# Altium PCB sinking-clock_Brain-PCB.PcbDoc
Units mil, origin at the board's own origin, x right, y up, seen from the top; angles counter-clockwise.
Board outline 2464.44 x 3503.81 mil, 2 copper layers (Top Layer, Bottom Layer); 61 components, 34 nets, 204 pads, 51 vias.
Unrouted connection lines stored in the file: 3.
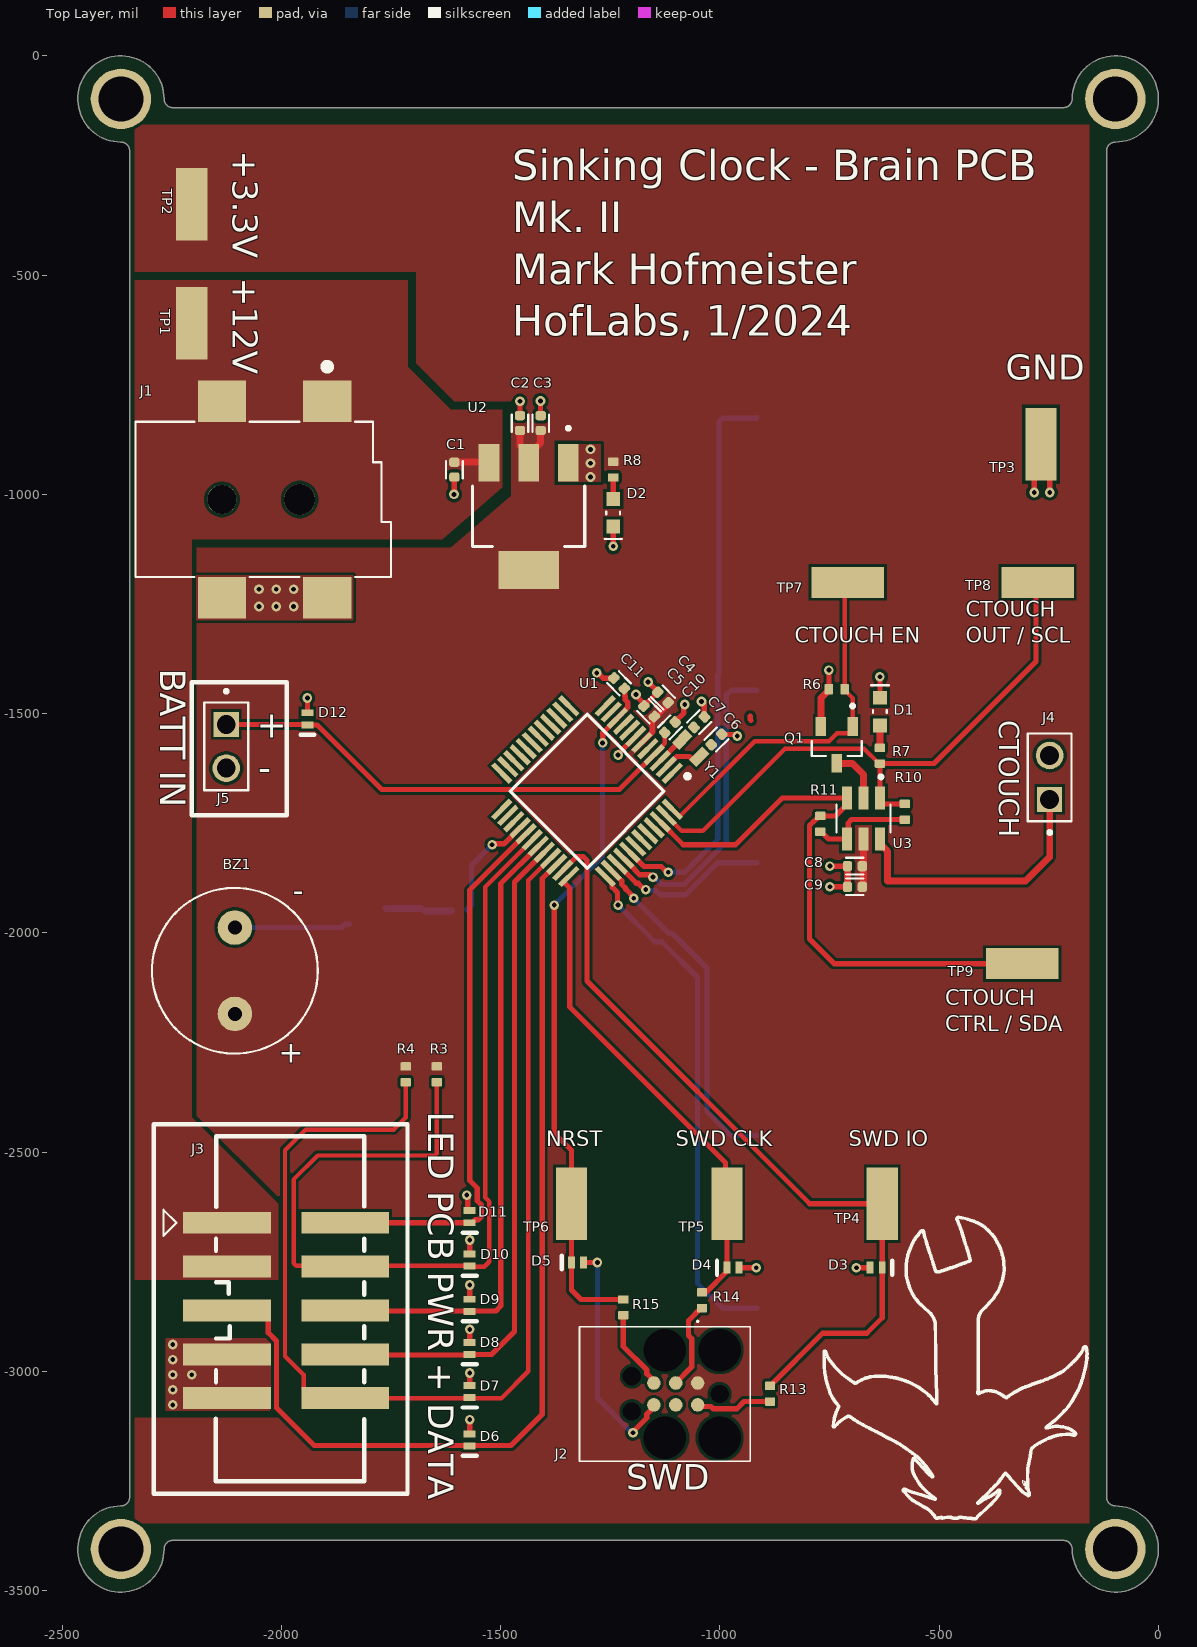
[diagram p0: Top Layer view]
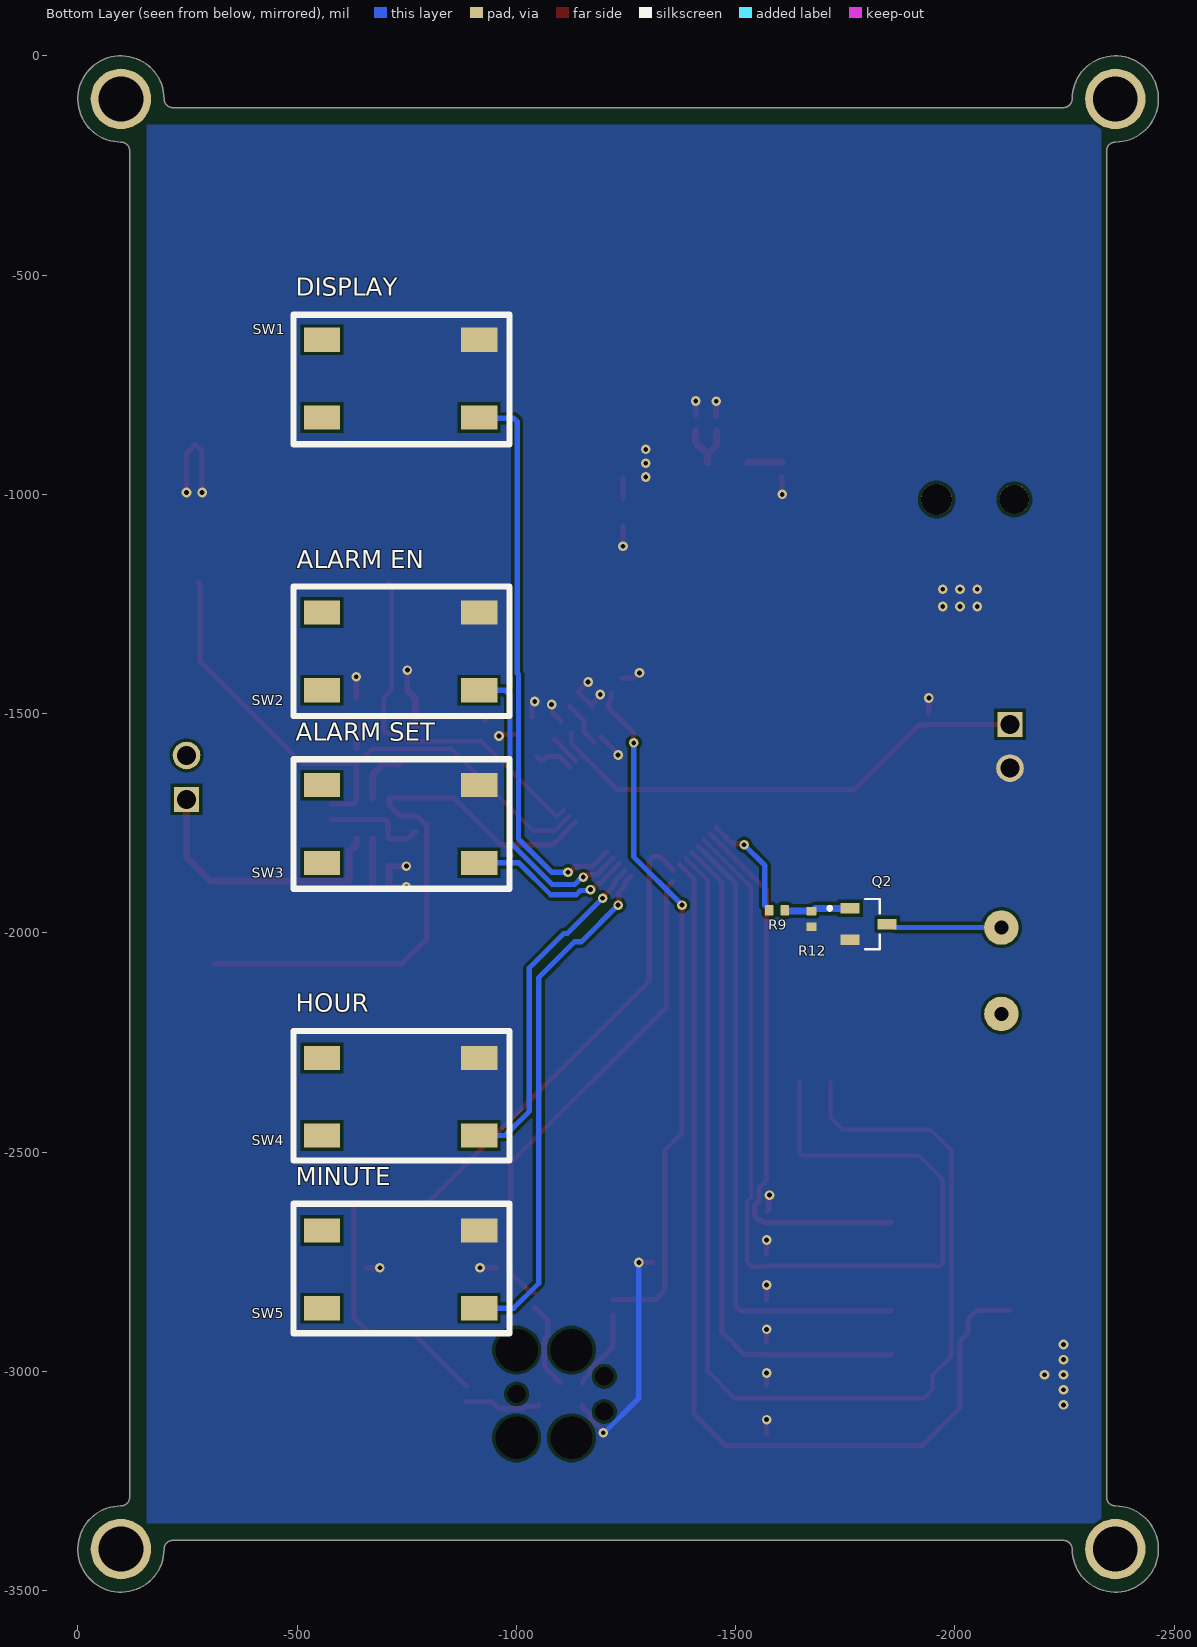
[diagram p1: Bottom Layer view, seen from below]
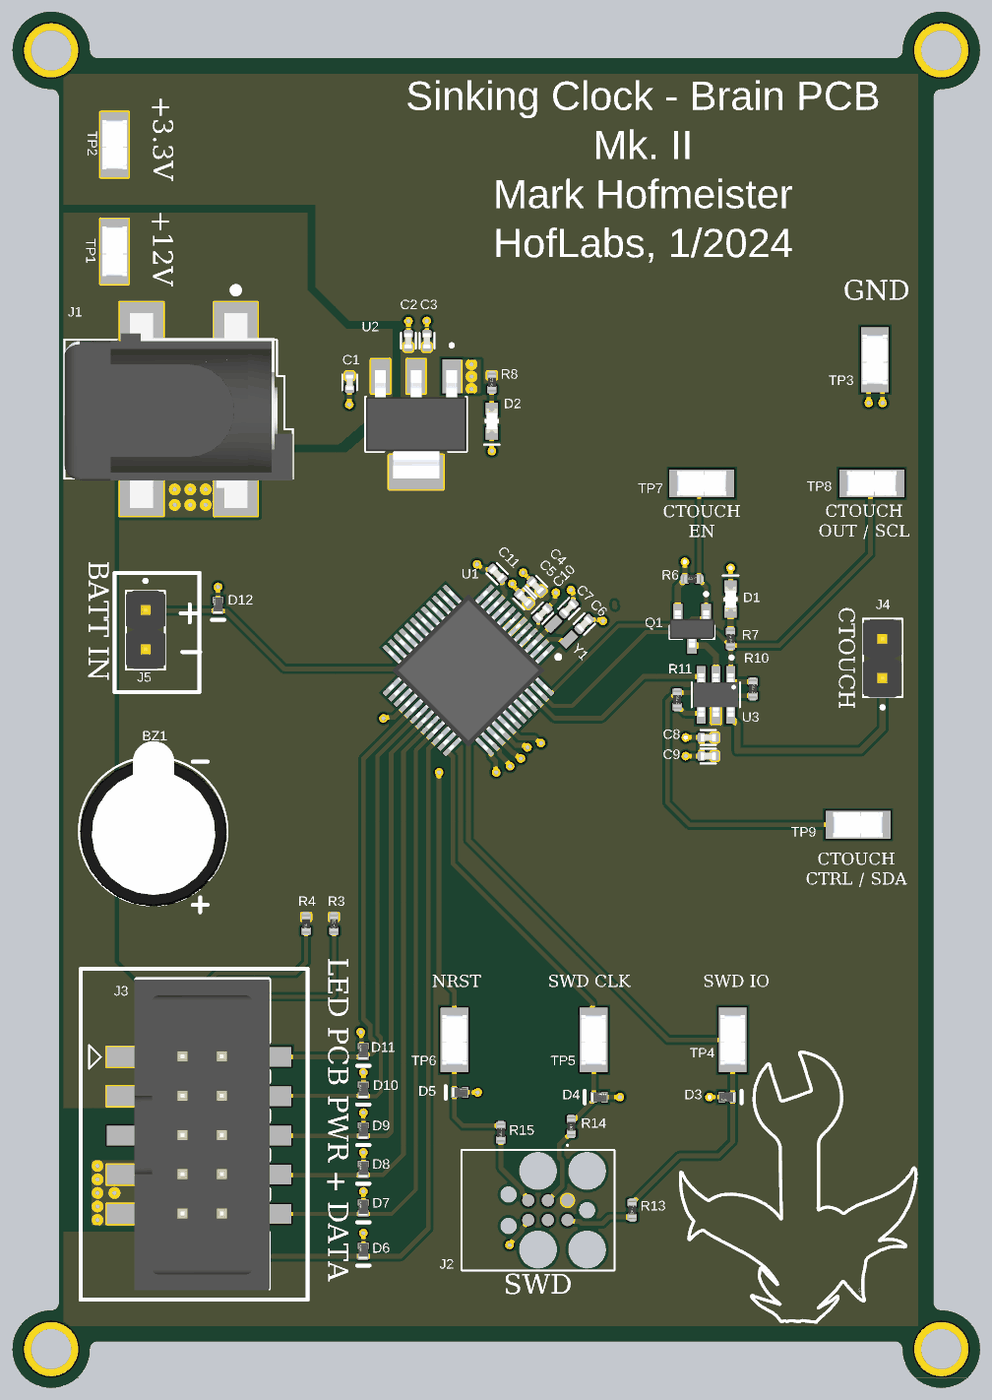
[diagram p2: 3D render of the assembled board from above, using the file's embedded part models]
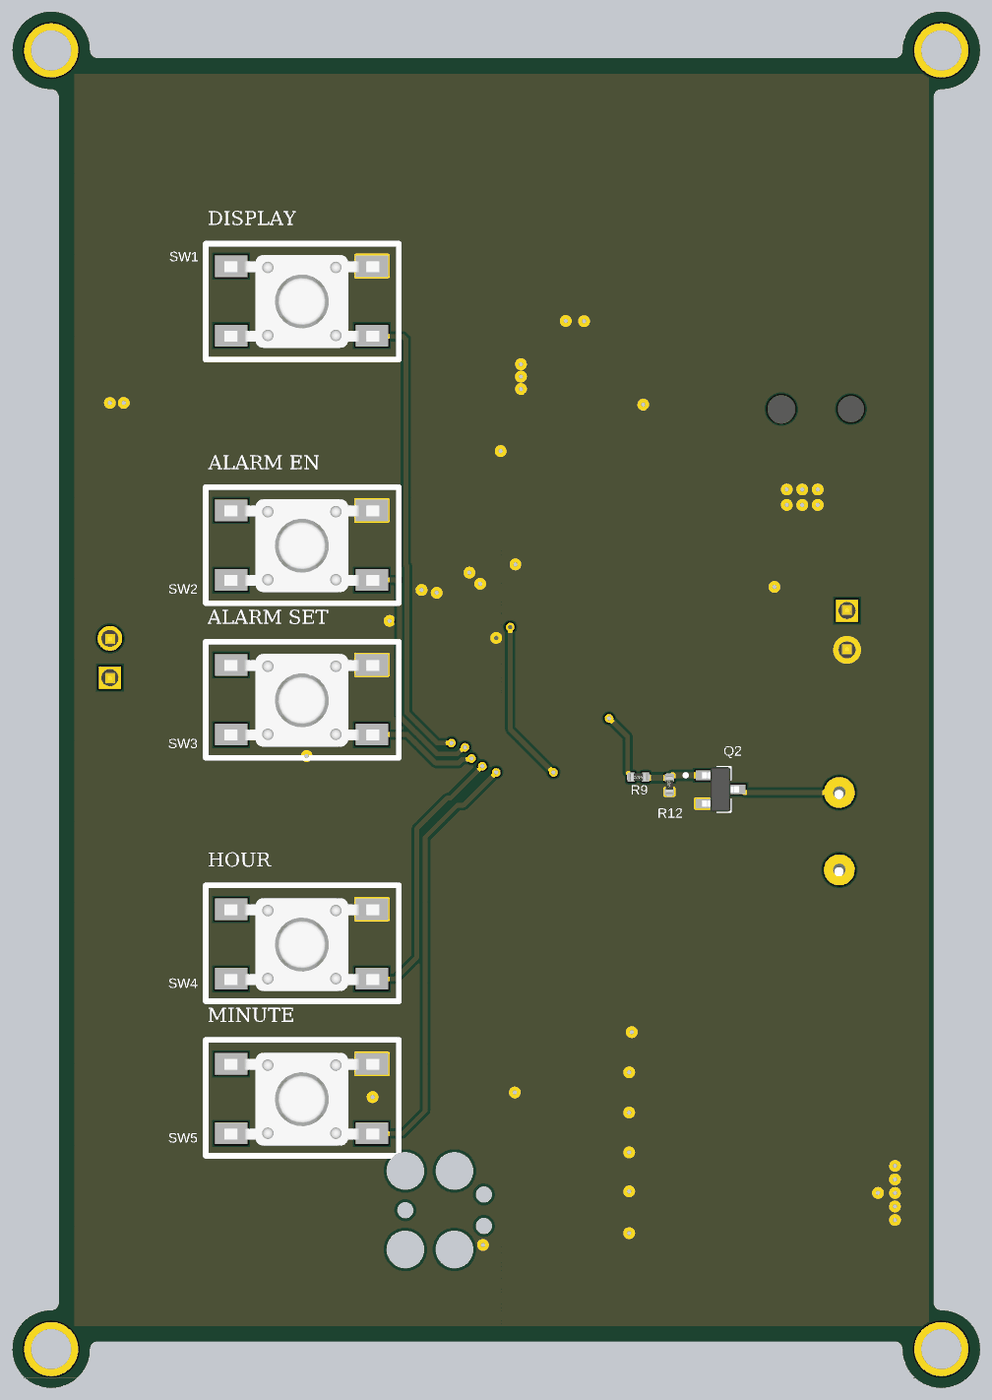
[diagram p3: 3D render of the assembled board from below, using the file's embedded part models]

## Layer stack, top to bottom
Top Solder: solder mask 0.4, Solder Resist, Dk 3.5
Top Layer: signal copper 1.4
Dielectric 1: dielectric 12.6, FR-4, Dk 4.8
Bottom Layer: signal copper 1.4
Bottom Solder: solder mask 0.4, Solder Resist, Dk 3.5

## Board outline
-2366.14,-3307.09 ccw(c-2366.14,-3405.51) -2267.72,-3405.51 cw(c-2248.03,-3405.51) -2248.03,-3385.83 -216.54,-3385.83 cw(c-216.54,-3405.51) -196.85,-3405.51 ccw(c-98.43,-3405.51) -98.43,-3307.09 cw(c-98.43,-3287.4) -118.11,-3287.4 -118.11,-216.54 cw(c-98.43,-216.54) -98.43,-196.85 ccw(c-98.43,-98.43) -196.85,-98.43 cw(c-216.54,-98.43) -216.54,-118.11 -2248.03,-118.11 cw(c-2248.03,-98.43) -2267.72,-98.43 ccw(c-2366.14,-98.43) -2366.14,-196.85 cw(c-2366.14,-216.54) -2346.46,-216.54 -2346.46,-3287.4 cw(c-2366.14,-3287.4)

## Design rules (kind name [scope] priority, off if disabled: settings)
Clearance [All] p1: gap=7 ignorepadtopadclearanceinfootprint=FALSE except(0: Arc-Hole Track-Hole SMDPad-Hole THPad-Hole Via-Hole Fill-Hole Poly-Hole Region-Hole Text-Hole)
HoleSize [All] p1: absolutevalues=TRUE maxlimit=106.3 minlimit=6 maxpercent=80.000 minpercent=20.000
MinimumSolderMaskSliver [All] p1: minsoldermaskwidth=0.98
PolygonConnect PolygonConnect_3 [InNet('GND') vs InNet('GND')] p1: connectstyle=Direct reliefconductorwidth=10 reliefentries=4 polygonreliefangle="90 Angle" airgapwidth=10
PolygonConnect PolygonConnect_2 [InNet('VCC')] p2: connectstyle=Direct reliefconductorwidth=10 reliefentries=4 polygonreliefangle="90 Angle" airgapwidth=10
PolygonConnect PolygonConnect_1 [InNet('+12')] p3: connectstyle=Direct reliefconductorwidth=10 reliefentries=4 polygonreliefangle="90 Angle" airgapwidth=10
PolygonConnect [All] p4: connectstyle=Relief reliefconductorwidth=10 reliefentries=4 polygonreliefangle="90 Angle" airgapwidth=10
RoomDefinition CTOUCH [InComponentClass('CTOUCH')] p1: confinementstyle=ConfineIn formatcopy=TRUE lockcomponents=FALSE outline -812.17,-1253.11 -812.17,-1148.46 -172.09,-1148.46 -172.09,-1253.11 -177.2,-1253.11 -177.2,-1789.13 -207.13,-1789.13 -207.13,-2122.8 -414.13,-2122.8 -414.13,-1927.52 -736.77,-1927.52 -736.77,-1833.62 -750.55,-1833.62 -750.55,-1799.96 -803.9,-1799.96 -803.9,-1655.87 -811.57,-1655.87 -811.57,-1253.11
RoomDefinition PWR [InComponentClass('PWR')] p2: confinementstyle=ConfineIn formatcopy=TRUE lockcomponents=FALSE outline -2353.5,-1304.29 -2353.5,-683.31 -2257.05,-683.31 -2257.05,-506.73 -2257.05,-235.08 -2152.4,-235.08 -2152.4,-506.73 -2152.4,-683.31 -1729.17,-683.31 -1729.17,-793.11 -1376.63,-793.11 -1376.63,-831.5 -1287.65,-831.5 -1287.65,-895.48 -1210.88,-895.48 -1210.88,-974.22 -1206.94,-974.22 -1206.94,-2789.8 -1008.5,-2789.8 -853.19,-2789.8 -853.19,-3002.8 -853.19,-3099.57 -918.46,-3099.57 -918.46,-2902.72 -1253.11,-2902.72 -1253.11,-1981.46 -1642.87,-1981.46 -1642.87,-1304.29
RoutingVias [All] p1: holewidth=11 width=22 viastyle="Through Hole" minholewidth=8 minwidth=16 maxholewidth=28 maxwidth=50
SilkToSolderMaskClearance [IsPad] p1: minsilkscreentomaskgap=3.94 clearancetoexposedcopper=TRUE
SolderMaskExpansion [All] p1: expansion=4 istentingtop=FALSE
UnRoutedNet [All] p1: checkbadconnections=TRUE
Width [All] p1: maxlimit=50 minlimit=6 preferedwidth=12 minimp=50.000000 maximp=50.000000 favimp=50.000000
26 further rules are at their usual default settings.

## Classes and differential pairs
component class PWR: C1 C2 C3 D2 J1 R8 R9 R13 R14 R15 TP1 TP2 U2
component class CTOUCH: C8 C9 D1 J4 Q1 R6 R7 R10 R11 TP7 TP8 TP9 U3

## Components (designator, comment, footprint, x,y, rotation, side; value= is the part's Value field where it differs from the comment)
BZ1 "CMI-9605IC-0380T" CUI_CMI-9605IC-0380T -2106.3,-2086.61 r180 top
C1 "CAP" 0402C -1605.72,-943.86 r90 top value=10uF
C2 "CAP" 0402C -1456.12,-837.56 r270 top value=10uF
C3 "CAP" 0402C -1408.87,-837.56 r270 top value=10uF
C4 "CAP" 0402C -1130.09,-1463.33 r315 top value=4.7uF
C5 "CAP" 0402C -1161.58,-1494.83 r315 top value=0.1uF
C6 "CAP" 0402C -1007.87,-1559.06 r225 top value=7pF
C7 "CAP" 0402C -1047.24,-1519.68 r225 top value=7pF
C8 "CAP" 0402C -692.32,-1848.03 r0 top value=100pF
C9 "CAP" 0402C -692.32,-1895.28 r0 top value=4.7uF
C10 "CAP" 0402C -1114.17,-1531.5 r225 top value=4.7uF
C11 "CAP" 0402C -1230,-1431 r315 top value=0.1uF
D1 "LED - single" "LED - 0603" -635.24,-1495.67 r90 top
D2 "LED - single" "LED - 0603" -1243.52,-1042.29 r270 top
D3 "7V" DESD3V3S1BL-7B -630.91,-2763.78 r180 top
D4 "7V" DESD3V3S1BL-7B -983.27,-2763.78 r0 top
D5 "7V" DESD3V3S1BL-7B -1337.6,-2751.97 r0 top
D6 "7V" DESD3V3S1BL-7B -1570.87,-3169.29 r90 top
D7 "7V" DESD3V3S1BL-7B -1570.87,-3059.06 r90 top
D8 "7V" DESD3V3S1BL-7B -1570.87,-2960.63 r90 top
D9 "7V" DESD3V3S1BL-7B -1570.87,-2862.4 r90 top
D10 "7V" DESD3V3S1BL-7B -1570.87,-2758.86 r90 top
D11 "7V" DESD3V3S1BL-7B -1570.87,-2660.43 r90 top
D12 "7V" DESD3V3S1BL-7B -1940.94,-1524.8 r90 top
J1 "PJ-002BH-SMT-TR" PJ-002BH-SMT-TR -1895.67,-787.4 r0 top
J2 "TC2030-IDC" "TAG CONNECT TC2030IDC - NO 3D MODEL" -1088.31,-3051.81 r180 top
J3 "5x2, 0.1' pitch SMT header" "5x2, 0.1' pitch SMT header" -1989.33,-2861.42 r270 top
J4 "2-pin connector" "2-pos, 0.1\" TH header" -248.03,-1645.67 r90 top value=DNS
J5 "2-pin connector" "2-pos, 0.1\" TH header" -2125.98,-1574.8 r270 top value=DNS
Q1 "NMOS" SOT-23 -733.66,-1571.46 r270 top
Q2 "NMOS" SOT-23 -1803.55,-1980.32 r180 bottom
R3 "RES" 0402R -1645.67,-2322.83 r90 top value=10k
R4 "RES" 0402R -1716.54,-2322.83 r90 top value=10k
R6 "RES" 0402R -733.66,-1444.49 r0 top value=10k
R7 "RES" 0402R -635.24,-1596.26 r270 top value=56
R8 "RES" 0402R -1243.52,-943.86 r90 top value=56
R9 "RES" 0402R -1594.49,-1948.82 r0 bottom value=56
R10 "RES" 0402R -578.35,-1724.02 r270 top value=4.7k
R11 "RES" 0402R -771.26,-1751.57 r270 top value=4.7k
R12 "RES" 0402R -1673.23,-1968.5 r90 bottom value=10k
R13 "RES" 0402R -885.83,-3051.18 r90 top value=56
R14 "RES" 0402R -1041.14,-2838.19 r90 top value=56
R15 "RES" 0402R -1220.47,-2854.33 r90 top value=56
SW1 "SPDT SMT Tactile Push Button Switch" TL3301BF160QGTUBE -736.22,-736.22 r90 bottom locked
SW2 "SPDT SMT Tactile Push Button Switch" TL3301BF160QGTUBE -736.22,-1358.27 r90 bottom locked
SW3 "SPDT SMT Tactile Push Button Switch" TL3301BF160QGTUBE -736.22,-1751.97 r90 bottom locked
SW4 "SPDT SMT Tactile Push Button Switch" TL3301BF160QGTUBE -736.22,-2374.02 r90 bottom locked
SW5 "SPDT SMT Tactile Push Button Switch" TL3301BF160QGTUBE -736.22,-2767.72 r90 bottom locked
TP1 "RCWCTE" RCWCTE -2204.72,-610.24 r270 top
TP2 "RCWCTE" RCWCTE -2204.72,-338.58 r270 top
TP3 "RCWCTE" RCWCTE -267.72,-885.83 r270 top
TP4 "RCWCTE" RCWCTE -629.92,-2618.11 r270 top
TP5 "RCWCTE" RCWCTE -984.25,-2618.11 r270 top
TP6 "RCWCTE" RCWCTE -1338.58,-2618.11 r270 top
TP7 "RCWCTE" RCWCTE -708.66,-1200.79 r0 top
TP8 "RCWCTE" RCWCTE -275.59,-1200.79 r0 top
TP9 "RCWCTE" RCWCTE -310.63,-2070.47 r0 top
U1 "STM32G031C6T6" 48-LQFP -1303.15,-1677.17 r225 top locked
U2 "AZ1117IH-3.3TRG1" SOT-223-3 -1436.43,-1050.16 r270 top
U3 "IQS228B00000000TSR" TSOT-23-6 -672.64,-1739.57 r270 top
Y1 "ECS-.327-7-12R-TR" ECS-.327-12.5-12R-TR -1066.93,-1578.74 r315 top

## Footprints (in the part's own frame and the unit in brackets; to place one, negate y for a bottom-side part, rotate by r counter-clockwise, add the part's x,y. Pads: shape width x height; smd on the part's side, far side on the other; paste and mask are expansions set on the pad)
"2-pos, 0.1\" TH header" [mm]
  rect 1.45x1.45 / inner round 1.45 / far side rect 1.45x1.45 hole 1.1: 1(-1.27,0)
  round 1.6 hole 1.1: 2(1.27,0)
  silkscreen extent -3.29,-1.27 2.54,1.27, body extent -2.57,-1.26 2.51,1.28, height 8.57
"5x2, 0.1' pitch SMT header" [mil] "CONN HEADER SMD 10POS 2.54MM"
  rect 50x200 smd: 1(-200,-135) 2(-200,135) 3(-100,-135) 4(-100,135) 5(0,-135) 6(0,135) 7(100,-135) 8(100,135) 9(200,-135) 10(200,135)
  silkscreen extent -398,-280 390,178, body extent -396,-165 394,180, height 496
48-LQFP [mm]
  rect 1.475x0.3 smd mask+0.03: 1(-4.238,2.75) 2(-4.238,2.25) 3(-4.238,1.75) 4(-4.238,1.25) 5(-4.238,0.75) 6(-4.238,0.25) 7(-4.238,-0.25) 8(-4.238,-0.75) 9(-4.238,-1.25) 10(-4.238,-1.75) 11(-4.238,-2.25) 12(-4.238,-2.75) 25(4.238,-2.75) 26(4.238,-2.25) 27(4.238,-1.75) 28(4.238,-1.25) 29(4.238,-0.75) 30(4.238,-0.25) 31(4.238,0.25) 32(4.238,0.75) 33(4.238,1.25) 34(4.238,1.75) 35(4.238,2.25) 36(4.238,2.75)
  rect 0.3x1.475 smd mask+0.03: 13(-2.75,-4.238) 14(-2.25,-4.238) 15(-1.75,-4.238) 16(-1.25,-4.238) 17(-0.75,-4.238) 18(-0.25,-4.238) 19(0.25,-4.238) 20(0.75,-4.238) 21(1.25,-4.238) 22(1.75,-4.238) 23(2.25,-4.238) 24(2.75,-4.238) 37(2.75,4.238) 38(2.25,4.238) 39(1.75,4.238) 40(1.25,4.238) 41(0.75,4.238) 42(0.25,4.238) 43(-0.25,4.238) 44(-0.75,4.238) 45(-1.25,4.238) 46(-1.75,4.238) 47(-2.25,4.238) 48(-2.75,4.238)
  silkscreen extent -4.85,-3.15 3.15,3.62, body extent -4.5,-4.5 4.5,4.5, height 1.6
0402C [mm] "0402 SMT Capacitor"
  rrect53% 0.54x0.6 smd: 1(-0.43,0) 2(0.43,0)
  silkscreen extent -0.5,-0.48 0.5,0.48, body extent -0.5,-0.25 0.5,0.25, height 0.5
0402R [mm] "0402 SMT Resistor"
  rrect20% 0.49x0.6 smd: 1(-0.455,0) 2(0.455,0)
  body extent -0.75,-0.25 0.75,0.25, height 0.35
CUI_CMI-9605IC-0380T [mm]
  round 2 hole 0.8: N(0,-2.5) P(0,2.5)
  silkscreen extent -4.8,-4.8 4.8,4.8, body extent -4.78,-5.82 4.72,4.88, height 5.05
DESD3V3S1BL-7B [mm]
  rect 0.4x0.7 smd mask+0.076: 1(-0.025,0) 2(0.675,0)
  silkscreen extent -0.6,-0.4 -0.6,0.4, body extent -0.18,-0.3 0.82,0.3, height 0.53
ECS-.327-12.5-12R-TR [mm]
  rect 0.6x1.1 smd: 1(-0.7,0) 2(0.7,0)
  body extent -1,-0.55 1,0.55, height 0.6
"LED - 0603" [mm]
  rect 0.8x0.8 smd: 1(-0.8,0) 2(0.8,0)
  silkscreen extent -0.08,-0.51 1.52,0.51, body extent -0.8,-0.35 0.8,0.35, height 0.7
PJ-002BH-SMT-TR [mm] "Barrel Jack 2.5mm ID 5.5mm OD"
  rect 2.8x2.4 smd: 1(-6.1,0) 1(0,0) 2(-6.1,-11.4) 3(0,-11.4)
  round 1.7 hole 1.7 unplated: ""(-6.1,-5.7)
  round 1.8 hole 1.8 unplated: ""(-1.6,-5.7)
  silkscreen extent -11.1,-10.2 3.7,2.19, body extent -11.1,-12.1 3.7,0.5, height 11
RCWCTE [mm]
  rect 4.2x1.8 smd: 1(0,0)
  body extent -1.6,-0.8 1.6,0.8, height 2.01
SOT-23 [mm]
  rect 1.09x0.61 smd: 1(-1.07,0.915) 2(-1.07,-0.915) 3(1.07,0)
  silkscreen extent -2.35,-1.45 0.65,1.45, body extent -1.2,-1.45 1.2,1.45, height 1.2
SOT-223-3 [mm]
  rect 2.2x1.2 smd: 1(-3.1,2.3) 2(-3.1,0) 3(-3.1,-2.3)
  rect 2.2x3.5 smd: 4(3.1,0)
  silkscreen extent -5.2,-3.25 1.75,3.25, body extent -3.5,-3.25 3.5,3.25, height 1.65
"TAG CONNECT TC2030IDC - NO 3D MODEL" [mil]
  round 30.83 smd: 1(-37.52,-25) 2(-37.52,25) 3(12.48,-25) 4(12.48,25) 5(62.52,-25) 6(62.52,25)
  round 48.25 hole 96.5 unplated: 7(-87.52,-100) 9(-87.52,100) 10(37.48,-100) 11(37.48,100)
  round 21 hole 42.01 unplated: 8(-87.52,0) 12(112.48,-40) 13(112.48,40)
  silkscreen extent -157,-167 232,154
TL3301BF160QGTUBE [mm]
  rect 1.4x2.1 smd: 1(-2.25,-4.55) 2(-2.25,4.55) 3(2.25,-4.55) 4(2.25,4.55)
  body extent -3.04,-5.02 2.96,4.98, height 9.55
TSOT-23-6 [mm]
  rect 1.34x0.59 smd: 1(-1.19,0.95) 2(-1.19,0) 3(-1.19,-0.95) 4(1.19,-0.95) 5(1.19,0) 6(1.19,0.95)
  silkscreen extent -2.52,-1.56 0.8,1.56, body extent -1.4,-1.45 1.4,1.45, height 1

## Part data
BZ1: "MAGNETIC BUZZER INDICATOR", MFR="CUI Devices", MFR PN=CMI-9605IC-0380T, Vendor=DigiKey, Vendor Link=https://www.digikey.com/en/products/detail/cui-devices/CMI-9605IC-0380T/11674180, Vendor PN=2223-CMI-9605IC-0380T-ND
C1 C2 C3: "Capaicitor", MFR="KYOCERA AVX", MFR PN=KGM05CR51A106MH, ClassName=PWR, Vendor=DigiKey, Vendor Link=https://www.digikey.com/en/products/detail/kyocera-avx/KGM05CR51A106MH/6564275, Vendor PN=478-KGM05CR51A106MHCT-ND
C4 C9 C10: "Capaicitor", MFR="Samsung Electro-Mechanics", MFR PN=CL05A475KQ5NRNC, Vendor=DigiKey, Vendor Link=https://www.digikey.com/en/products/detail/samsung-electro-mechanics/CL05A105KL5NRNC/5961280, Vendor PN=1276-6796-1-ND
  C9: ClassName=CTOUCH
C5 C11: "Capaicitor", MFR="Samsung Electro-Mechanics", MFR PN=CL05A104KP5NNNC, Vendor=DigiKey, Vendor Link=https://www.digikey.com/en/products/detail/samsung-electro-mechanics/CL05A104KP5NNNC/3886680, Vendor PN=1276-1022-1-ND
C6 C7: "Capaicitor", MFR="Murata Electronics", MFR PN=GJM1555C1H7R0DB01D, Vendor=DigiKey, Vendor Link=https://www.digikey.com/en/products/detail/murata-electronics/GJM1555C1H7R0DB01D/2593109, Vendor PN=490-13315-1-ND
C8: "Capaicitor", MFR="Walsin Technology Corporation", MFR PN=HH15N101J500CT, ClassName=CTOUCH, Vendor=DigiKey, Vendor Link=https://www.digikey.com/en/products/detail/walsin-technology-corporation/HH15N101J500CT/14836854, Vendor PN=1292-HH15N101J500CT-ND
D1 D2: "LED", Color=Green, MFR=Dialight, MFR PN=5988070107F, Vendor=DigiKey, Vendor Link=https://www.digikey.com/en/products/detail/dialight/5988070107F/1291269, Vendor PN=350-2035-1-ND
  D1: ClassName=CTOUCH
  D2: ClassName=PWR
D3 D4 D5 D6 D7 D8 D9 D10 D11 D12: library part "TVS Diode Bi", MFR="Diodes Incorporated", MFR PN=DESD3V3E1BL-7B
J1: "2.5 mm Center Pin, 5.0 A, Right Angle, Surface Mount (SMT), Dc Power Jack Connector", MFR="CUI Devices", ClassName=PWR, MFR PN=PJ-002BH-SMT-TR, Vendor=DigiKey, Vendor Link=https://www.digikey.com/en/products/detail/cui-devices/PJ-002BH-SMT-TR/404626, Vendor PN=CP-002BHPJCT-ND
J2: "\"Plug of Nails\" POGO Pin connector", MFR=Tag-Connect, MFR PN=TC2030-IDC-NL
J3: "CONN HEADER SMD 10POS 2.54MM", MFR="CNC Tech", MFR PN=3020-10-0300-00, Vendor=DigiKey, Vendor Link=https://www.digikey.com/en/products/detail/cnc-tech/3020-10-0300-00/3441727, Vendor PN=1175-1621-ND
J4 J5: "2-pos connector, 0.1\", TH, male"
  J4: ClassName=CTOUCH
Q1 Q2: "N-Channel MOSFET", MFR="Diodes Incorporated", MFR PN=DMN63D8L
  Q1: ClassName=CTOUCH, Vendor=DigiKey, Vendor Link=https://www.digikey.com/en/products/detail/diodes-incorporated/DMN63D8L-7/5699705, Vendor PN=DMN63D8L-7DICT-ND
R3 R4 R6 R12: "Resistor", MFR=YAGEO, MFR PN=RC0402JR-0710KL, Vendor=DigiKey, Vendor Link=https://www.digikey.com/en/products/detail/yageo/RC0402JR-0710KL/726418, Vendor PN=311-10KJRCT-ND
  R6: ClassName=CTOUCH
R7 R8 R9 R13 R14 R15: "Resistor", MFR=YAGEO, MFR PN=RC0402FR-0756RL, Vendor=DigiKey, Vendor Link=https://www.digikey.com/en/products/detail/yageo/RC0402FR-0756RL/726636, Vendor PN=311-56.0LRCT-ND
  R7: ClassName=CTOUCH
  R8 R9 R13 R14 R15: ClassName=PWR
R10 R11: "Resistor", MFR=YAGEO, MFR PN=AC0402FR-134K7L, ClassName=CTOUCH, Vendor=DigiKey, Vendor Link=https://www.digikey.com/en/products/detail/yageo/AC0402FR-134K7L/14008367, Vendor PN=13-AC0402FR-134K7LCT-ND
SW1 SW2 SW3 SW4 SW5: "Tactile Push Button Switch, Gull Wing Lead, 9.5mm contact height", MFR=E-Switch, MFR PN=TL3301BF160QG, Vendor=DigiKey, Vendor Link=https://www.digikey.com/en/products/detail/e-switch/TL3301BF160QGTUBE/1805543, Vendor PN=141-TL3301BF160QGTUBE-ND
TP1 TP2 TP3 TP4 TP5 TP6 TP7 TP8 TP9: library part "Test Point", "Test Point, Surface Mount", MFR="KOA Speer Electronics, Inc.", MFR PN=RCWCTE, Vendor=DigiKey, Vendor Link=https://www.digikey.com/en/products/detail/koa-speer-electronics-inc/RCWCTE/11476558, Vendor PN=2019-RCWCTECT-ND
  TP1 TP2: ClassName=PWR
  TP7 TP8 TP9: ClassName=CTOUCH
U1: "STM32G031C6T6 - ARM MCU, STM32 Family STM32G0 Series Microcontrollers, ARM Cortex-M0+, 32bit, 64 MHz, 32 KB, 8 KB", MFR=STMicroelectronics, MFR PN=STM32G031C6T6, Vendor=DigiKey, Vendor Link=https://www.digikey.com/en/products/detail/stmicroelectronics/STM32G031C6T6/10300268, Vendor PN=497-19555-ND
U2: "IC REG LINEAR 3.3V 1A SOT223", MFR="Diodes Incorporated", ClassName=PWR, MFR PN=AZ1117IH-3.3TRG1, Vendor=DigiKey, Vendor Link=https://www.digikey.com/en/products/detail/diodes-incorporated/AZ1117IH-3-3TRG1/5699672, Vendor PN=AZ1117IH-3.3TRG1DICT-ND
U3: "Azoteq 1 CH Capacitive Sensor", MFR=Azoteq, ClassName=CTOUCH, MFR PN=IQS228B00000000TSR, Vendor=DigiKey, Vendor Link=https://www.digikey.com/en/products/detail/azoteq-pty-ltd/IQS228B-00000000-TSR/13663636, Vendor PN=1790-IQS228B-00000000-TSRCT-ND
Y1: "SMD Tuning Fork Crystal", MFR="ECS Inc.", MFR PN=ECS-.327-7-12R-TR, Vendor=DigiKey, Vendor Link=https://www.digikey.com/en/products/detail/ecs-inc/ECS-327-7-12R-TR/8593599, Vendor PN=XC2743CT-ND

## Free pads (board coordinates)
  round 137.8 hole 102.36: 4(-2366.14,-3405.51) 4(-2366.14,-98.43) 4(-98.43,-3405.51) 4(-98.43,-98.43)

## Via types
v1: diameter 22, hole 11, Top Layer to Bottom Layer, 51 vias

## Nets (pads, with @x,y where several pads share a name; then routed paths per layer and width w, separated by ;. In a path a pad name is that pad's centre, name@x,y a point inside that pad or via, vN(x,y) a via of type N, cw(c..) or ccw(c..) an arc to the next point about the centre after c; other vN are vias at no path point)
+12: C1.2 J1.1 J3.1 J3.3 TP1.1 U2.3 | length 79.2
  Top Layer w16: C1.2 -1528.16,-926.93 U2.3
ALARM_EN_BUTTON: SW2.1 U1.40 | length 710
  Top Layer w12: U1.40 -1195.19,-1854.72 -1195.19,-1855.69 -1182.92,-1867.96 -1159.6,-1867.96 -1154.36,-1873.19 v1(-1152.72,-1873.19)
  Bottom Layer w12: v1(-1152.72,-1873.19) -1150.02,-1873.19 -1133.45,-1889.76 -1081.99,-1889.76 -985.94,-1793.71 -985.94,-1458.09 -974.69,-1446.85 SW2.1
Alarm_LED: D6.1 J3.5 U1.34 | length 2251.6
  Top Layer w12: J3.5 -2049.33,-2861.42 -2030.33,-2880.42 -2030.33,-2912.03 -2011.33,-2931.03 -2011.33,-3083.16 -1925.2,-3169.29 -1570.87,-3169.29 -1476.38,-3169.29 -1405.51,-3098.43 -1405.51,-1876.96 U1.34
ALARM_SET_BUTTON: SW3.1 U1.39 | length 377.5
  Top Layer w12: U1.39 -1190.79,-1886.96 -1186.61,-1886.96 -1172,-1901.57 v1(-1169.29,-1901.57)
  Bottom Layer w12: v1(-1169.29,-1901.57) -1167.38,-1903.49 -1146.59,-1903.49 -1136.7,-1913.39 -1078.74,-1913.39 -1005.91,-1840.55 SW3.1
BUZZER_OUT: R9.2 U1.28 | length 253
  Top Layer w12: v1(-1519.68,-1799.21) -1517.77,-1797.3 -1492.88,-1797.3 U1.28
  Bottom Layer w12: R9.2 -1576.57,-1946.65 -1566.93,-1937.01 -1566.93,-1846.46 v1(-1519.68,-1799.21)
CAPTOUCH_EN: Q1.1 R6.2 TP7.1 U1.48 | length 847.3
  Top Layer w10: U1.48 -1092.39,-1734.81 -1092.26,-1734.81 -920.44,-1562.99 -751.5,-1562.99 -733.29,-1544.79 -703.65,-1544.79 -697.64,-1538.78 Q1.1 -697.64,-1464.76 -715.75,-1446.65 R6.2 -715.75,-1207.87 TP7.1
CAPTOUCH_IN: J4.1 U3.6 | length 626.3
  Top Layer w15.75: -618.11,-1881.89 -303.15,-1881.89 -248.03,-1826.77 J4.1@-248.03,-1698.37
  Top Layer w16: U3.6 -635.24,-1801.18 -631.62,-1804.8 -627.48,-1804.8 -618.11,-1814.17 -618.11,-1881.89
CAPTOUCH_OUT_SCL: R7.2 R10.1 TP8.1 U1.47 U3.1 | length 1373.9
  Top Layer w10: U1.47 -1087.32,-1767.72 -1039.37,-1767.72 -851.78,-1580.13 -671.45,-1580.13 -637.4,-1614.17 R7.2
  Top Layer w12: R10.1 -629.62,-1706.1 -635.24,-1700.49 U3.1 R7.2 -511.81,-1614.17 -279.13,-1381.5 -279.13,-1204.33 TP8.1
CTOUCH_CTRL_SDA: R11.1 TP9.1 U1.46 U3.3 | length 1380.5
  Top Layer w12: U1.46 -1083.67,-1799.21 -964.57,-1799.21 -858.07,-1692.72 U3.3 -710.04,-1707.48 -736.22,-1733.66 R11.1 -773.43,-1735.83 -775.59,-1735.83 -786.61,-1746.84 -787.33,-1746.84 -796.07,-1755.59 -796.07,-2014.17 -739.76,-2070.47 TP9.1
DISPLAY_BUTTON: SW1.1 U1.41 | length 1295.5
  Top Layer w12: U1.41 -1173.11,-1848.96 -1134.06,-1848.96 -1120.82,-1862.2 v1(-1118.11,-1862.2)
  Bottom Layer w12: v1(-1118.11,-1862.2) -1081.3,-1862.2 -1004.94,-1785.84 -1004.94,-1410.88 -1002,-1407.94 -1002,-833.8 -994.97,-826.77 -917.32,-826.77 SW1.1
GND: C1.1 C2.1 C3.1 C4.1 C5.1 C6.1 C7.1 C8.1 C9.1 C10.1 C11.1 D1.2 D2.2 D3.2 D4.2 D5.2 D6.2 D7.2 D8.2 D9.2 D10.2 D11.2 D12.2 J1.2 J1.3 J2.6 J3.7 J3.9 J5.2 Q1.2 Q2.2 R6.1 R12.1 SW1.3 SW2.3 SW3.3 SW4.3 SW5.3 TP3.1 U1.7 U2.1 | length 1881.5
  Top Layer w12: D12.2 v1(-1940.94,-1464.57) ; v1(-1606.65,-1000.35) -1606.18,-999.88 -1606.18,-961.25 C1.1 ; v1(-1577.43,-2598.43) -1575.52,-2600.34 -1575.52,-2631.98 -1572.74,-2631.98 D11.2 ; D6.2 v1(-1570.87,-3110.24) ; D7.2 v1(-1570.87,-3003.94) ; D8.2 v1(-1570.87,-2904.58) ; D9.2 v1(-1570.87,-2803.15) ; D10.2 v1(-1570.87,-2700.79) ; v1(-1456.12,-787.98) C2.1 C2.1@-1454.94,-820.63 ; v1@-1411.36,-789.31 v1(-1409.45,-787.4) -1409.16,-787.69 -1409.16,-820.35 C3.1 ; D5.2 v1(-1279.53,-2751.97) ; v1(-1281.18,-1407.38) -1278.48,-1407.38 -1265.99,-1419.86 -1242.81,-1419.86 C11.1 ; v1(-1243.52,-1118.69) D2.2 ; v1(-1232.28,-1594.49) -1232.28,-1592.38 U1.7 ; v1(-1198.53,-3140.19) -1198.53,-3137.93 -1166.78,-3106.19 -1166.78,-3097.86 -1150.83,-3081.91 J2.6 ; v1(-1191.51,-1456.69) -1191.51,-1459.39 -1172.72,-1478.18 -1172.72,-1482.02 C5.1 ; C5.1@-1169.44,-1478.75 C4.1 -1142.06,-1450.01 v1(-1163.82,-1428.24) ; C10.1 -1102.2,-1518.56 -1082.44,-1498.8 -1082.44,-1481.46 v1(-1080.53,-1479.55) ; v1(-1042.07,-1472.44) -1036.11,-1478.4 -1036.11,-1506.88 C7.1 ; C6.1 -995.07,-1547.92 -967.83,-1547.92 -964.57,-1551.18 v1(-960.63,-1551.18) ; D4.2 v1(-917.32,-2763.78) ; -931.05,-1505.64 -931.05,-1513.83 -929.13,-1515.75 ; R6.1 v1(-751.57,-1401.07) ; v1(-749.43,-1895.28) C9.1 ; v1(-749.43,-1848.03) C8.1 ; v1(-688.98,-2763.78) D3.2 ; D1.2 v1(-635.24,-1416.26) ; v1(-283.46,-996.06) -283.46,-901.57 TP3.1 -248.03,-905.51 v1(-248.03,-996.06)
  Top Layer w16: Q1.2 -769.68,-1464.76 -751.57,-1446.65 R6.1 ; C9.1 C8.1
  Bottom Layer w12: v1(-1279.53,-2751.97) -1279.53,-3061.16 -1200.49,-3140.19 v1(-1198.53,-3140.19)
  other v1: -2248.03,-3076.77 -2248.03,-3042.32 -2248.03,-3007.87 -2204.72,-3007.87 -2248.03,-2973.43 -2248.03,-2938.98 -2051.18,-1255.91 -2011.81,-1255.91 -1972.44,-1255.91 -2051.18,-1216.54 -2011.81,-1216.54 -1972.44,-1216.54 -1295.28,-960.63 -1295.28,-929.13 -1295.28,-897.64
HOUR_SET_BUTTON: SW4.1 U1.38 | length 781.9
  Top Layer w12: U1.38 -1224.02,-1881.57 -1224.02,-1889.87 -1214.72,-1899.17 -1214.72,-1900.68 -1196.85,-1918.55 v1(-1196.85,-1921.26)
  Bottom Layer w12: v1(-1196.85,-1921.26) -1116.21,-2001.9 -1108.33,-2001.9 -1029.6,-2080.63 -1029.6,-2407.69 -974.69,-2462.6 SW4.1
MINUTE_SET_BUTTON: SW5.1 U1.37 | length 1183.4
  Top Layer w12: U1.37 -1245.5,-1887.92 -1245.5,-1896.23 -1233.72,-1908.01 -1233.72,-1935.57 v1(-1232.28,-1937.01)
  Bottom Layer w12: v1(-1232.28,-1937.01) -1148.65,-2020.64 -1132.9,-2020.64 -1051.18,-2102.36 -1051.18,-2799.21 -994.09,-2856.3 SW5.1
NetBZ1_N: BZ1.N Q2.3 | length 263.9
  Bottom Layer w12: BZ1.N -1863,-1988.19 -1855.13,-1980.32 Q2.3
NetC6_2: C6.2 U1.2 Y1.2 | length 90.8
  Top Layer w12: U1.2 -1122.4,-1621.82 -1098.61,-1598.03 -1069.77,-1598.03 -1062.62,-1605.19 -1054.4,-1605.19 Y1.2
NetC7_2: C7.2 U1.3 Y1.1 | length 70.2
  Top Layer w12: U1.3 -1136.32,-1607.9 -1087.67,-1559.25 Y1.1
NetC10_2: C10.2 D12.1 J5.1 U1.4 | length 1131.1
  Top Layer w10: U1.4 -1150.37,-1592.7 -1125.65,-1567.99 -1125.65,-1560.48 -1125.55,-1560.38 -1125.55,-1544.06 C10.2
  Top Layer w12: J5.1 -1940.94,-1524.8 -1939.33,-1526.42 -1918.46,-1526.42 -1771.43,-1673.45 -1229.84,-1673.45 U1.4
NetD1_1: D1.1 R7.1 | length 51.2
  Top Layer w16: R7.1 D1.1
NetD2_1: D2.1 R8.1 | length 49
  Top Layer w12: D2.1 R8.1
NetJ2_2: J2.2 R13.1 | length 175.6
  Top Layer w12: J2.2 -1047.19,-3080.41 -1020.27,-3080.41 -1014.87,-3085.81 -961.62,-3085.81 -944.89,-3069.09 R13.1
NetJ2_3: J2.3 R14.1 | length 202.9
  Top Layer w12: J2.3 -1064.54,-2990.56 -1064.54,-2925.96 -1072,-2918.5 -1072,-2884.8 -1043.31,-2856.1 R14.1
NetJ2_5: J2.5 R15.1 | length 183.4
  Top Layer w12: R15.1 -1220.47,-2943.74 -1166.78,-2997.43 -1166.78,-3005.76 -1150.83,-3021.72 J2.5
NetQ1_3: Q1.3 U3.2 | length 129.9
  Top Layer w16: Q1.3 -733.66,-1613.71 -729.65,-1617.72 -729.65,-1614.35 -697.65,-1614.35 -672.64,-1639.37 U3.2
NetQ2_1: Q2.1 R9.1 R12.2 | length 141.4
  Bottom Layer w16: Q2.1 R12.2@-1681.69,-1944.29 ; R12.2 -1614.05,-1950.59 -1612.4,-1948.94 R9.1
NRST: C11.2 D5.1 R15.2 TP6.1 U1.10 | length 1578.7
  Top Layer w12: v1(-1377.95,-1937.01) -1377.95,-2456.69 -1338.58,-2496.06 TP6.1 D5.1 -1338.58,-2814.96 -1317.13,-2836.42 R15.2 ; v1(-1267.72,-1566.93) -1267.15,-1566.36 -1267.15,-1543.73 U1.10 -1233.89,-1510.33 -1215.08,-1491.53 -1215.08,-1490.56 -1210.1,-1485.58 -1210.1,-1474.81 -1215.94,-1468.97 -1215.94,-1461.57 -1217.21,-1460.3 -1216.38,-1459.46 C11.2@-1216.38,-1452.41
  Bottom Layer w12: v1(-1377.95,-1937.01) -1267.72,-1826.77 v1(-1267.72,-1566.93)
SHIFT_DATA_CLK: D8.1 J3.8 U1.32 | length 1529.8
  Top Layer w12: J3.8 -1852.73,-2963.02 D8.1@-1566.93,-2963.02 ; D8.1@-1566.93,-2961.61 -1520.67,-2961.61 -1468.5,-2909.45 -1468.5,-1884.28 U1.32
SHIFT_DATA_IN: D11.1 J3.2 U1.29 | length 1249.5
  Top Layer w12: J3.2 -1712.6,-2661.42 ; -1708.66,-2661.42 -1564.96,-2661.42 -1558.28,-2654.73 -1551.7,-2654.73 -1544.09,-2647.12 -1544.09,-2620.6 -1553.43,-2611.25 -1553.43,-2581.92 -1570.87,-2564.48 -1570.87,-1903.12 U1.29
SHIFT_MCLR: D7.1 J3.10 R4.1 U1.33 | length 2687.3
  Top Layer w10: R4.1 -1716.54,-2421.26 -1744.09,-2448.82 -1944.88,-2448.82 -1992.13,-2496.06 -1992.13,-2965.59 -1949.33,-3008.39 -1949.33,-3041.42 -1929.33,-3061.42 J3.10 -1498.43,-3061.42 -1437.01,-3000 -1437.01,-1880.62 U1.33
SHIFT_OUTPUT_EN: D10.1 J3.4 R3.1 U1.30 | length 2170.2
  Top Layer w10: R3.1 -1645.67,-2503.54 -1650,-2507.87 -1917.32,-2507.87 -1972.44,-2562.99 -1972.44,-2753.98 -1966.58,-2759.84 -1855.91,-2759.84 J3.4 -1852.76,-2759.84 D10.1 ; D10.1@-1570.87,-2761.42 -1537.35,-2761.42 -1526.09,-2750.15 -1526.09,-2613.14 -1535.43,-2603.8 -1535.43,-1895.53 U1.30
SHIFT_STORE_CLK: D9.1 J3.6 U1.31 | length 1444
  Top Layer w12: J3.6 -1853.35,-2862.4 -1570.87,-2862.4 -1511.16,-2862.4 -1500,-2851.24 -1500,-1887.94 U1.31
SWD_CLK: D4.1 R14.2 TP5.1 U1.36 | length 1119.5
  Top Layer w12: U1.36@-1356.51,-1883.77 -1342.52,-1897.76 -1342.52,-2169.29 -987.35,-2524.46 -987.35,-2615.01 TP5.1 D4.1 -986.13,-2765.65 -986.13,-2774.21 -1032.19,-2820.28 R14.2
SWD_IO: D3.1 R13.2 TP4.1 U1.35 | length 1810.7
  Top Layer w12: U1.35 -1327.48,-1826.77 -1311.02,-1826.77 -1303.15,-1834.65 -1303.15,-2110.24 -795.28,-2618.11 TP4.1 D3.1 -629.92,-2877.95 -665.35,-2913.39 -765.94,-2913.39 R13.2
VCC: BZ1.P C2.2 C3.2 C4.2 C5.2 C8.2 C9.2 J2.1 R3.2 R4.2 R8.2 TP2.1 U1.6 U2.2 U2.4 U3.5 | length 363.7
  Top Layer w12: U1.6 -1178.21,-1566.01 -1154.22,-1542.02 -1154.22,-1516.74 -1153.38,-1515.91 C4.2@-1121.89,-1484.41
  Top Layer w16: C2.2 -1456.12,-888.74 U2.2@-1436.43,-908.43 ; U2.2 U2.2@-1436.43,-908.43 ; C3.2 -1408.87,-883.43 -1418.25,-892.81 -1420.81,-892.81 U2.2@-1436.43,-908.43 ; C9.2 -675.39,-1894.09 -672.64,-1891.34 U3.5
VREG: R10.2 R11.2 U3.4 | length 238.6
  Top Layer w12: R11.2 -769.09,-1769.49 -752.17,-1786.42 U3.4 -707.58,-1783.95 -707.58,-1749.43 -700.07,-1741.93 R10.2
pads on no net: J1. J2.4 J2.7 J2.8 J2.9 J2.10 J2.11 J2.12 J2.13 J4.2 SW1.2 SW1.4 SW2.2 SW2.4 SW3.2 SW3.4 SW4.2 SW4.4 SW5.2 SW5.4 U1.1 U1.5 U1.8 U1.9 U1.11 U1.12 U1.13 U1.14 U1.15 U1.16 U1.17 U1.18 U1.19 U1.20 U1.21 U1.22 U1.23 U1.24 U1.25 U1.26 U1.27 U1.42 U1.43 U1.44 U1.45

## Polygon pours and split planes (outlines as drawn)
VCC on Top Layer "VCC_L01_P008" (solid, remove dead copper, pour order 8): -2334.65,-492.13 -2334.65,-157.48 -157.48,-157.48 -157.48,-3346.46 -2334.65,-3346.46 -2334.65,-3106.3 -1988.19,-3106.3 -1988.19,-2622.05 -2192.91,-2417.32 -2192.91,-1122.05 -1614.17,-1122.05 -1476.38,-1003.94 -1476.38,-787.4 -1606.3,-787.4 -1692.91,-700.79 -1692.91,-492.13
GND on Top Layer "GND_L01_P001" (solid, remove dead copper, pour order 1): -2263.78,-3090.55 -2007.87,-3090.55 -2007.87,-2925.2 -2263.78,-2925.2
+12 on Top Layer "+12_L01_P007" (solid, remove dead copper, pour order 7): -2334.65,-511.81 -1712.6,-511.81 -1712.6,-708.66 -1614.17,-807.09 -1496.06,-807.09 -1496.06,-984.25 -1551.18,-1031.5 -1633.86,-1102.36 -2204.72,-1102.36 -2204.72,-2421.26 -2007.87,-2618.11 -2007.87,-2791.34 -2334.65,-2791.34
GND on Top Layer "GND_L01_P005" (solid, pour order 5): -1366.14,-971.4 -1271.65,-971.4 -1271.65,-885.83 -1366.14,-885.83
GND on Top Layer "GND_L01_P000" (solid, pour order 0): -2194.88,-1185.04 -1836.61,-1185.04 -1836.61,-1287.4 -2194.88,-1287.4
GND on Bottom Layer "GND_L02_P002" (solid, remove dead copper, pour order 2): -2334.65,-157.48 -157.48,-157.48 -157.48,-3346.46 -2334.65,-3346.46

## Silkscreen, mask and mechanical layers (free items; w line width, h text height)
Top Overlay:
  drawing of 663 lines, arcs and shapes, not listed
  text "+3.3V" at -2130.53,-216.2 h98.43 r270
  text "+12V" at -2131.08,-506.67 h98.43 r270
  text "Sinking Clock - Brain PCB / Mk. II / Mark Hofmeister / HofLabs, 1/2024" at -1474,-661.42 h118.11
  text "GND" at -348.55,-757.82 h98.43
  text "CTOUCH EN" at -828.94,-1349.64 h60
  text "CTOUCH / OUT / SCL" at -439.88,-1350.44 h60
  text "BATT IN" at -2295.62,-1397.5 h100 r270
  text "CTOUCH" at -378.55,-1515.15 h78.74 r270
  text "+" at -2056.93,-1555.11 h60
  text "-" at -2052.99,-1653.85 h60
  text "CTOUCH  / CTRL / SDA" at -485.74,-2236.27 h60
  text "LED PCB PWR + DATA" at -1684.88,-2408.06 h100 r270
  text "NRST" at -1396.31,-2498.17 h60
  text "SWD CLK" at -1100.72,-2498.06 h60
  text "SWD IO" at -705.8,-2498.06 h60
  text "SWD" at -1214.26,-3289.92 h100
Bottom Overlay:
  lines w14: -984.25,-2913.39 -492.13,-2913.39 -492.13,-2618.11 -984.25,-2618.11 -984.25,-2913.39 ; -984.25,-2519.68 -492.13,-2519.68 -492.13,-2224.41 -984.25,-2224.41 -984.25,-2519.68 ; -984.25,-1899.61 -492.13,-1899.61 -492.13,-1604.33 -984.25,-1604.33 -984.25,-1899.61 ; -984.25,-1505.91 -492.13,-1505.91 -492.13,-1210.63 -984.25,-1210.63 -984.25,-1505.91 ; -984.25,-885.83 -984.25,-590.55 -492.13,-590.55 -492.13,-885.83 -984.25,-885.83
  text "DISPLAY" at -497.31,-560.43 h70
  text "ALARM EN" at -498.83,-1182.64 h70
  text "ALARM SET" at -496.75,-1576.18 h70
  text "HOUR" at -496.8,-2194.16 h70
  text "MINUTE" at -496.66,-2589.54 h70
Mechanical 1:
  circle w7.87: c-99.43,-99.41 r51.18
  circle w7.87: c-2366.14,-3406.5 r51.18
  circle w7.87: c-2366.14,-99.38 r51.18
  circle w7.87: c-99.43,-3406.5 r51.18
Outline:
  the board outline again, w10

## Text inside footprints (layer, text, board x,y; h text height)
BZ1: Mechanical 13 "-" at -1948.82,-1890.16 h50 r180; Mechanical 13 "+" at -1948.82,-2254.72 h50 r180; Top Overlay "-" at -1948.82,-1890.16 h50 r180; Top Overlay "+" at -1948.82,-2254.72 h50 r180